# Altium PCB 4501-WB-AV-BMS-REV-C.PcbDoc
Units mm, origin at the board's own origin, x right, y up, seen from the top; angles counter-clockwise.
Board outline 182.69 x 84.61 mm, 4 copper layers (Top Layer, Int1 (GND), Int2 (PWR), Bottom Layer), stack 1.57 mm thick; 89 components, 79 nets, 324 pads, 146 vias.
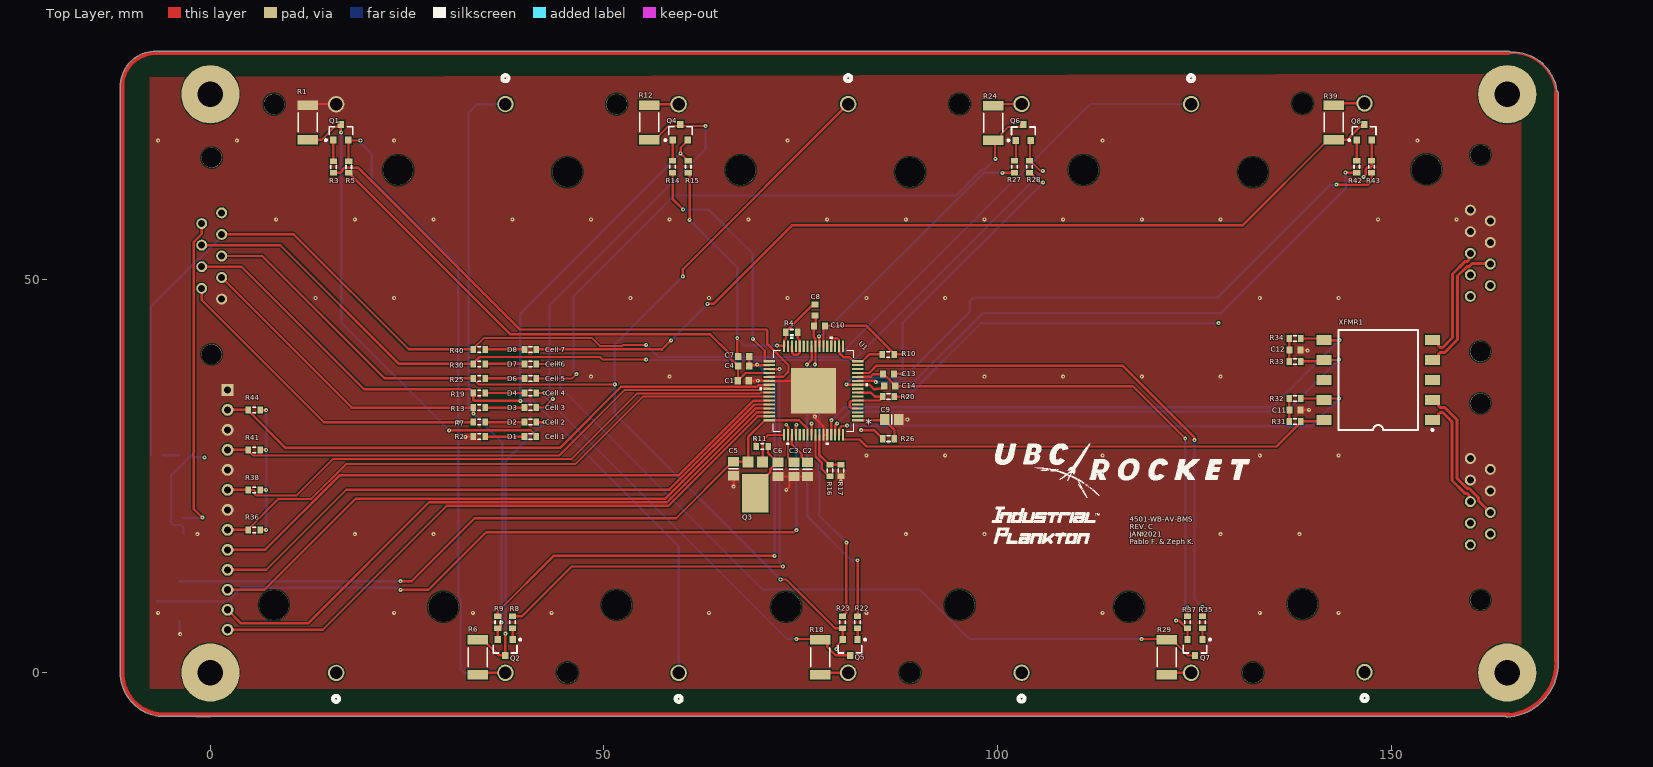
[diagram p0: Top Layer view]
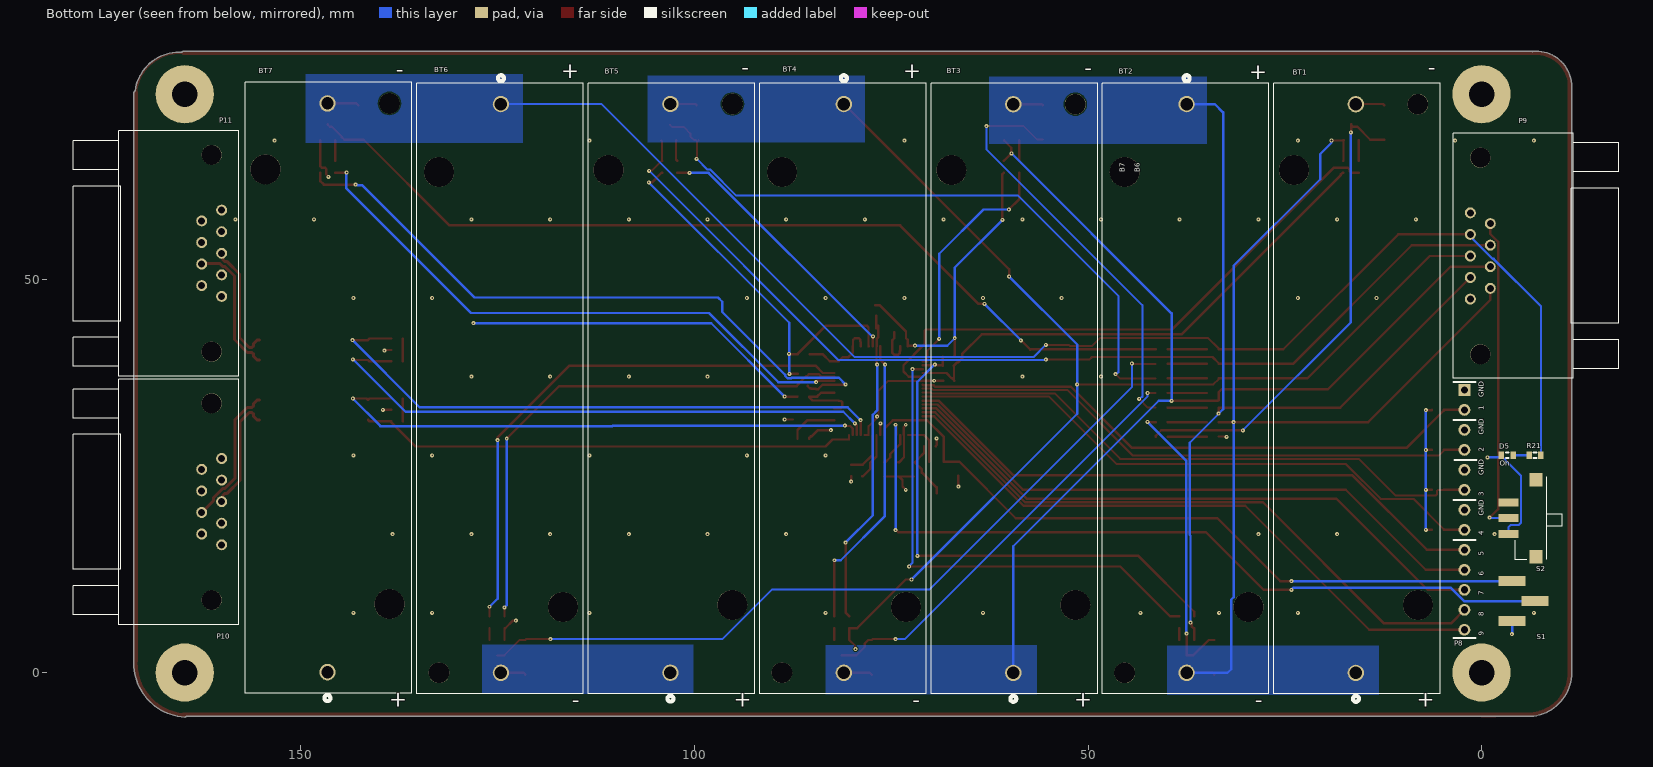
[diagram p1: Bottom Layer view, seen from below]
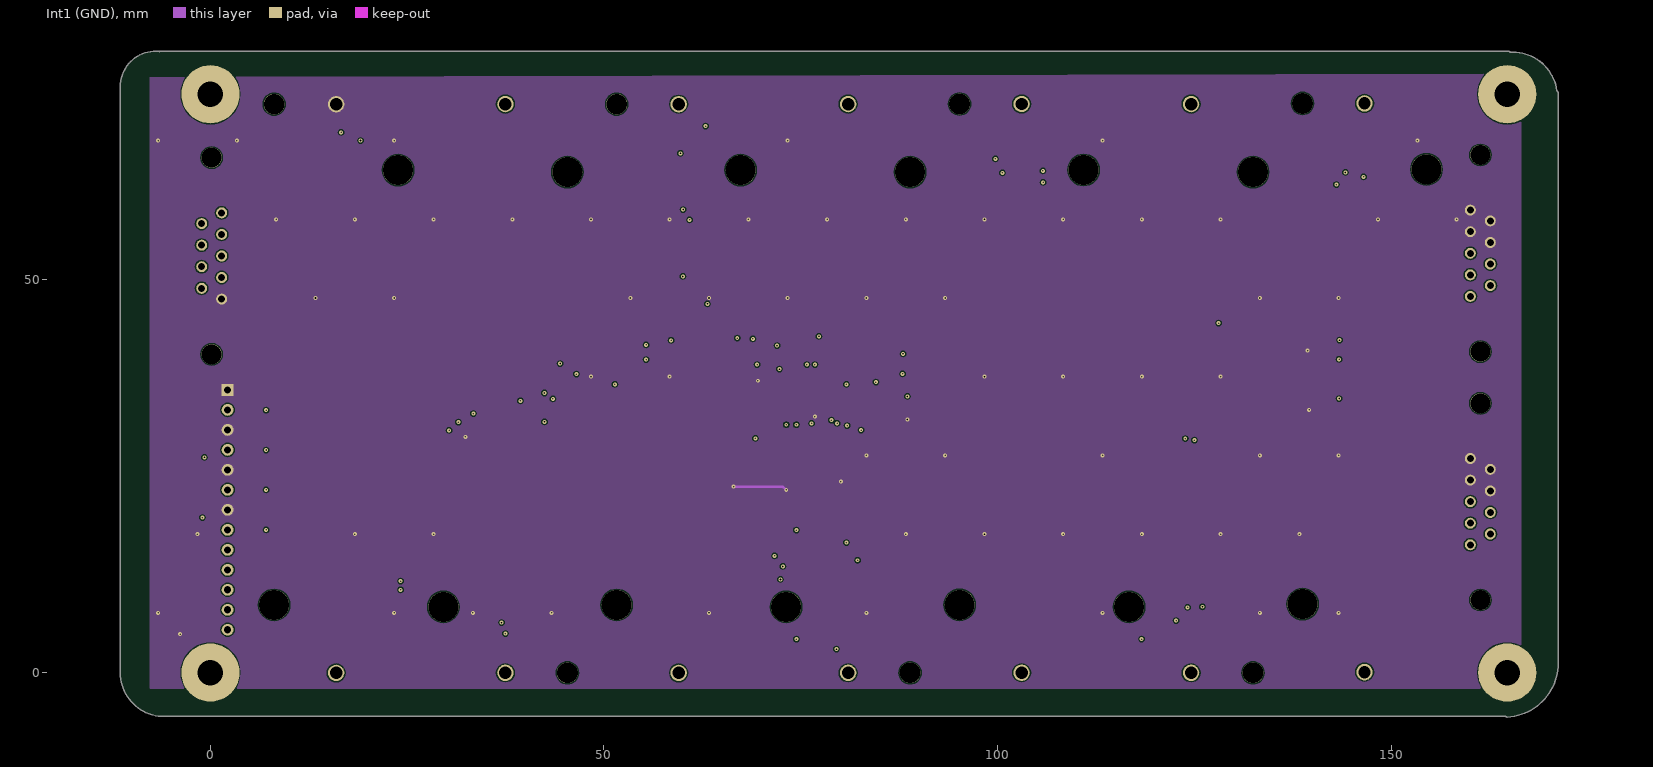
[diagram p2: Int1 (GND)]
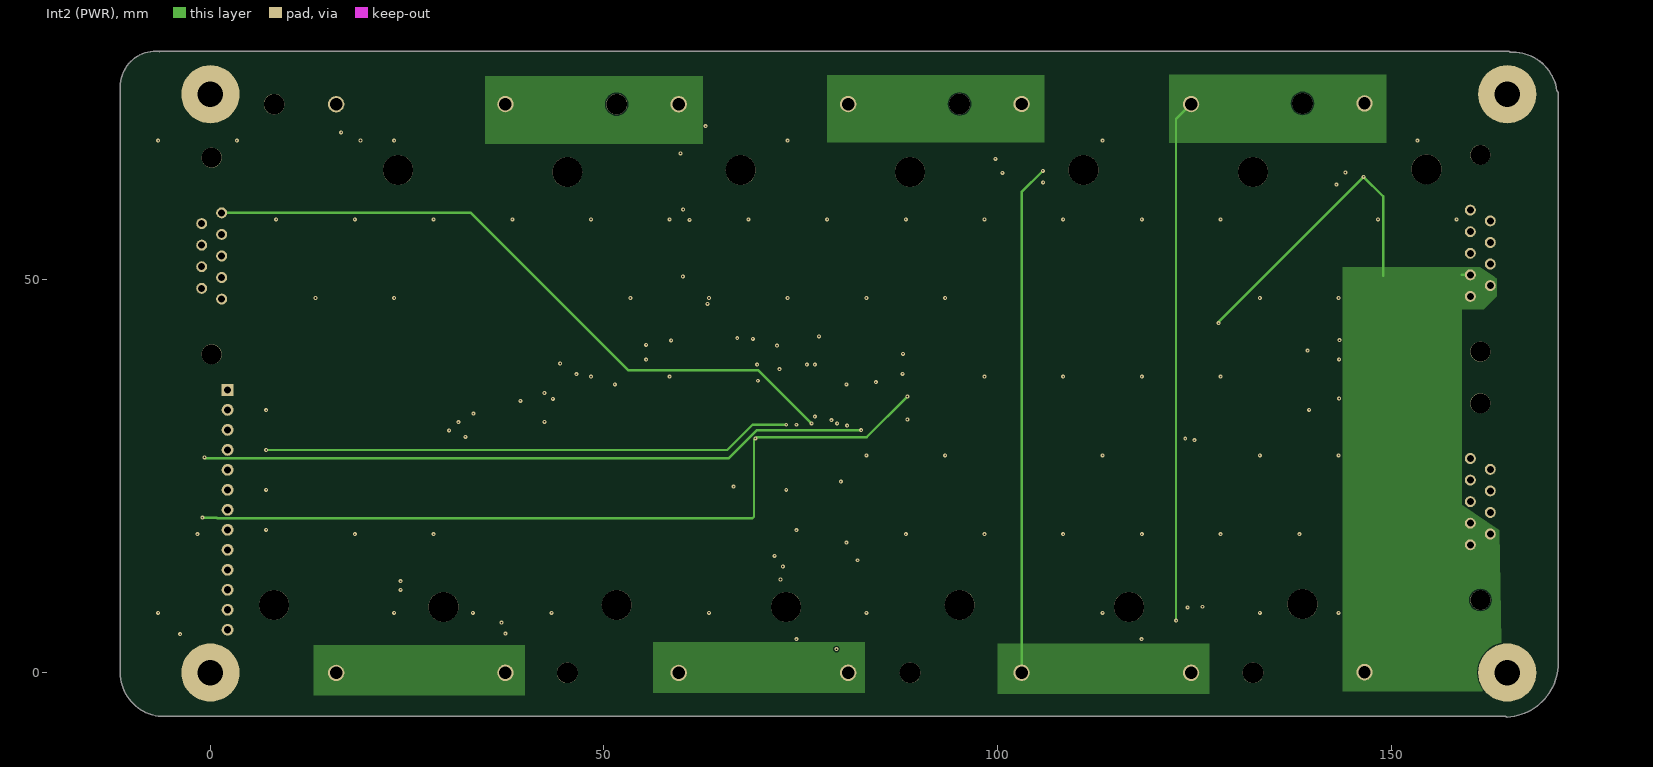
[diagram p3: Int2 (PWR)]
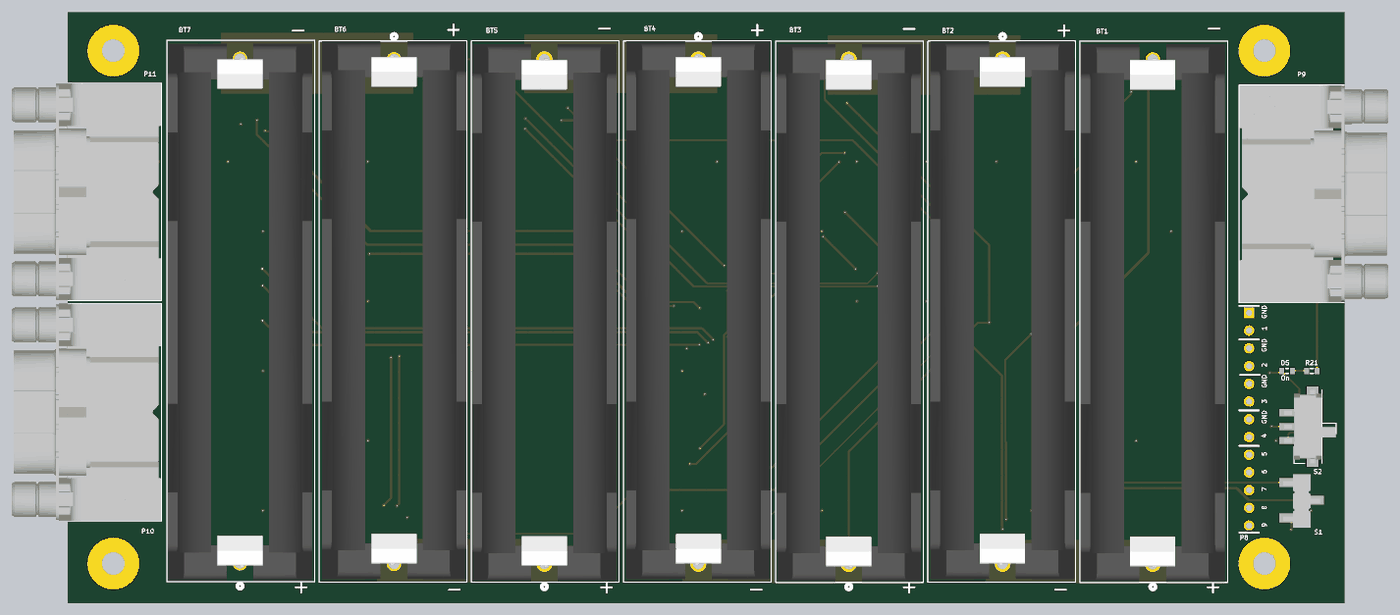
[diagram p4: 3D render of the assembled board from below, using the file's embedded part models]

## Layer stack, top to bottom
Top Solder: solder mask 0.0254, SM-001, Dk 4
Top Layer: signal copper 0.035
Dielectric 2: prepreg 0.2, PP-017, Dk 4.3
Int1 (GND): signal copper 0.0175
Dielectric 3: core 1.065, Core-039, Dk 4.8
Int2 (PWR): signal copper 0.0175
Dielectric 4: prepreg 0.2, PP-017, Dk 4.3
Bottom Layer: signal copper 0.035
Bottom Solder: solder mask 0.0254, SM-001, Dk 4

## Board outline
-11.447,-0.041 cw(c-11.196,-0.04) -11.447,-0.039 -11.447,74.799 cw(c-11.196,74.8) -11.446,74.822 cw(c-6.947,74.44) -6.565,78.939 cw(c-6.586,78.689) -6.461,78.906 cw(c-6.336,78.689) -6.336,78.94 164.922,78.94 cw(c164.922,78.689) 165.128,78.832 cw(c165.447,73.166) 171.072,73.919 cw(c170.97,73.69) 171.22,73.69 171.22,1.681 cw(c170.982,1.601) 171.232,1.617 cw(c164.37,1.202) 171.245,1.202 cw(c164.37,1.202) 164.785,-5.66 cw(c164.77,-5.41) 164.581,-5.574 -5.85,-5.574 -5.848,-5.574 ccw(c-5.85,-5.324) -5.847,-5.574 -5.848,-5.574 cw(c-5.881,-0.008)

## Design rules (kind name [scope] priority, off if disabled: settings)
AcuteAngle [All] p1: minimum=6.00000000000000E+0001 checktracksonly=FALSE
Clearance [All] p1: gap=0.152 ignorepadtopadclearanceinfootprint=FALSE except(0: Arc-Hole Track-Hole SMDPad-Hole THPad-Hole Via-Hole Fill-Hole Poly-Hole Region-Hole Text-Hole)
ComponentClearance [All] p1: gap=0 collisioncheckmode=3 verticalgap=0.003 showdistances=FALSE
DiffPairsRouting [All] p1: maxlimit=0.254 minlimit=0.254 mostfreqgap=0.254 toplayer_minwidth=0.381 toplayer_maxwidth=0.381 toplayer_prefwidth=0.381 midlayer1_minwidth=0.381 midlayer1_maxwidth=0.381 midlayer1_prefwidth=0.381 midlayer2_minwidth=0.381 midlayer2_maxwidth=0.381 midlayer2_prefwidth=0.381 bottomlayer_minwidth=0.381 bottomlayer_maxwidth=0.381 bottomlayer_prefwidth=0.381 maxuncoupledlength=12.7
HoleSize [All] p1: absolutevalues=TRUE maxlimit=25.4 minlimit=0.025 maxpercent=80.000 minpercent=20.000
MinimumSolderMaskSliver [All] p1: minsoldermaskwidth=0.025
PolygonConnect [All] p1: connectstyle=Direct reliefconductorwidth=0.254 reliefentries=4 polygonreliefangle="90 Angle" airgapwidth=0.254
RoutingVias [All] p1: holewidth=0.2 width=0.505 viastyle="Through Hole" minholewidth=0.2 minwidth=0.505 maxholewidth=0.711 maxwidth=1.27
SilkToSilkClearance [All] p1: silktosilkclearance=0.025
SilkToSolderMaskClearance [IsPad] p1: minsilkscreentomaskgap=0.025 clearancetoexposedcopper=TRUE
SolderMaskExpansion [All] p1: expansion=0.102 istentingtop=FALSE
Width [All] p1: maxlimit=2.794 minlimit=0.254 preferedwidth=0.305
24 further rules are at their usual default settings.

## Classes and differential pairs
differential pair IB: +IB_P -IB_N
differential pair IA: +IA_P -IA_N

## Components (designator, comment, footprint, x,y, rotation, side; value= is the part's Value field where it differs from the comment)
BT1 "Battery" 1043_KEY#1 15.969,72.22 r90 bottom
BT2 "Battery" 1043_KEY#1 37.477,-0.03 r270 bottom
BT3 "Battery" 1043_KEY#1 59.493,72.22 r90 bottom
BT4 "Battery" 1043_KEY#1 81.025,-0.03 r270 bottom
BT5 "Battery" 1043_KEY#1 103.065,72.243 r90 bottom
BT6 "Battery" 1043_KEY#2 124.597,-0.03 r270 bottom
BT7 "Battery" 1043_KEY#2 146.637,72.321 r90 bottom
C1 "399-1092-1-ND" 1608[0603] 67.714,37.079 r180 top value=10nF
C2 "311-3498-1-ND" 6-0805_N 75.877,25.813 r90 top value=1uF
C3 "311-3498-1-ND" 6-0805_N 74.116,25.813 r90 top value=1uF
C4 "399-1092-1-ND" 1608[0603] 67.749,38.956 r0 top value=10nF
C5 "311-3498-1-ND" 6-0805_N 66.472,25.9 r90 top value=1uF
C6 "1276-1090-1-ND" 6-0805_N 72.121,25.813 r90 top value=100nF
C7 "399-1092-1-ND" 1608[0603] 67.754,40.16 r180 top value=10nF
C8 "399-1092-1-ND" 1608[0603] 76.797,46.078 r270 top value=10nF
C9 "1276-1090-1-ND" 6-0805_N 86.564,32.179 r180 top value=100nF
C10 "399-1092-1-ND" 1608[0603] 77.377,44.049 r0 top value=10nF
C11 "399-1092-1-ND" 1608[0603] 137.805,33.371 r180 top value=10nF
C12 "399-1092-1-ND" 1608[0603] 137.805,40.991 r180 top value=10nF
C13 "399-1092-1-ND" 1608[0603] 86.164,37.948 r180 top value=10nF
C14 "399-1092-1-ND" 1608[0603] 86.309,36.398 r180 top value=10nF
D1 "160-1435-1-ND" J1-0603 40.654,29.972 r180 top
D2 "160-1435-1-ND" J1-0603 40.654,31.823 r180 top
D3 "160-1435-1-ND" J1-0603 40.654,33.673 r180 top
D4 "160-1435-1-ND" J1-0603 40.654,35.524 r180 top
D5 "LED0" J1-0603 -3.263,27.617 r180 bottom
D6 "160-1435-1-ND" J1-0603 40.654,37.375 r180 top
D7 "160-1435-1-ND" J1-0603 40.654,39.225 r180 top
D8 "160-1435-1-ND" J1-0603 40.654,41.076 r180 top
P8 "Header 13" DIP10 2.179,35.92 r180 bottom
P9 "3-338168-2" CONN_3-338168-2 22.09,58.416 r90 bottom
P10 "3-338168-2" CONN_3-338168-2 139.416,16.237 r270 bottom
P11 "3-338168-2" CONN_3-338168-2 139.416,47.797 r270 bottom
Q1 "BSS308PEH6327XTSA1CT-ND" SOT95P245X110-3N 16.571,68.649 r90 top
Q2 "BSS308PEH6327XTSA1CT-ND" SOT95P245X110-3N 37.453,3.188 r270 top
Q3 "DXT5551P5-13CT-ND" DXT5551P5-13 69.238,22.787 r180 top
Q4 "BSS308PEH6327XTSA1CT-ND" SOT95P245X110-3N 59.706,68.649 r90 top
Q5 "BSS308PEH6327XTSA1CT-ND" SOT95P245X110-3N 81.275,3.188 r270 top
Q6 "BSS308PEH6327XTSA1CT-ND" SOT95P245X110-3N 103.279,68.62 r90 top
Q7 "BSS308PEH6327XTSA1CT-ND" SOT95P245X110-3N 125.098,3.188 r270 top
Q8 "BSS308PEH6327XTSA1CT-ND" SOT95P245X110-3N 146.596,68.649 r90 top
R1 "A130642CT-ND" 12Z-2010 12.377,69.908 r90 top value=33
R2 "RMCF2010JT33R0CT-ND" J1-0603 34.166,29.972 r0 top value=475
R3 "A129543CT-ND" J1-0603 15.621,64.249 r270 top value=3.3k
R4 "A129676CT-ND" J1-0603 73.877,43.241 r0 top value=100
R5 "A129676CT-ND" J1-0603 17.571,64.249 r270 top value=100
R6 "A130642CT-ND" 12Z-2010 33.973,1.946 r270 top value=33
R7 "RMCF2010JT33R0CT-ND" J1-0603 34.166,31.823 r0 top value=475
R8 "A129543CT-ND" J1-0603 38.403,6.393 r90 top value=3.3k
R9 "A129676CT-ND" J1-0603 36.503,6.393 r90 top value=100
R10 "A129676CT-ND" J1-0603 86.111,40.437 r180 top value=100
R11 "A129676CT-ND" J1-0603 70.098,28.735 r180 top value=100
R12 "A130642CT-ND" 12Z-2010 55.74,69.908 r90 top value=33
R13 "RMCF2010JT33R0CT-ND" J1-0603 34.166,33.673 r0 top value=475
R14 "A129543CT-ND" J1-0603 58.717,64.262 r270 top value=3.3k
R15 "A129676CT-ND" J1-0603 60.706,64.262 r270 top value=100
R16 "RNCP0603FTD1K00CT-ND" J1-0603 78.715,25.677 r90 top value=1k
R17 "RNCP0603FTD1K00CT-ND" J1-0603 80.11,25.677 r270 top value=1k
R18 "A130642CT-ND" 12Z-2010 77.495,1.946 r270 top value=33
R19 "RMCF2010JT33R0CT-ND" J1-0603 34.166,35.524 r0 top value=475
R20 "A129676CT-ND" J1-0603 86.164,35.065 r180 top value=100
R21 "RMCF2010JT33R0CT-ND" J1-0603 -6.798,27.617 r180 bottom value=475
R22 "A129543CT-ND" J1-0603 82.225,6.393 r90 top value=3.3k
R23 "A129676CT-ND" J1-0603 80.325,6.393 r90 top value=100
R24 "A130642CT-ND" 12Z-2010 99.471,69.845 r90 top value=33
R25 "RMCF2010JT33R0CT-ND" J1-0603 34.166,37.375 r0 top value=475
R26 "A129676CT-ND" J1-0603 86.164,29.715 r180 top value=100
R27 "A129543CT-ND" J1-0603 102.184,64.262 r270 top value=3.3k
R28 "A129676CT-ND" J1-0603 104.084,64.262 r270 top value=100
R29 "A130642CT-ND" 12Z-2010 121.496,1.946 r270 top value=33
R30 "RMCF2010JT33R0CT-ND" J1-0603 34.166,39.225 r0 top value=475
R31 "311-2598-1-ND" J1-0603 137.805,31.921 r180 top value=50
R32 "311-2598-1-ND" J1-0603 137.805,34.826 r0 top value=50
R33 "311-2598-1-ND" J1-0603 137.805,39.536 r180 top value=50
R34 "311-2598-1-ND" J1-0603 137.805,42.446 r0 top value=50
R35 "A129543CT-ND" J1-0603 126.048,6.393 r90 top value=3.3k
R36 "RNCP0603FTD10K0CT-ND" J1-0603 5.55,18.14 r180 top value=10k
R37 "A129676CT-ND" J1-0603 124.148,6.393 r90 top value=100
R38 "RNCP0603FTD10K0CT-ND" J1-0603 5.55,23.22 r180 top value=10k
R39 "A130642CT-ND" 12Z-2010 142.733,69.908 r90 top value=33
R40 "RMCF2010JT33R0CT-ND" J1-0603 34.166,41.076 r0 top value=475
R41 "RNCP0603FTD10K0CT-ND" J1-0603 5.55,28.3 r180 top value=10k
R42 "A129543CT-ND" J1-0603 145.646,64.262 r270 top value=3.3k
R43 "A129676CT-ND" J1-0603 147.546,64.262 r270 top value=100
R44 "RNCP0603FTD10K0CT-ND" J1-0603 5.55,33.38 r180 top value=10k
S1 "S9337-ND, SAM8981-ND" *TSM-103-01-L-SV -5.338,9.083 r90 bottom
S2 "SS312SAH4-R" *SW_SS312SAH4-R -4.963,19.621 r0 bottom
U1 "LTC6812ILWE-1#3ZZPBF-ND" "LQFP64_LWE_A - duplicate" 76.627,35.815 r180 top value=Value
XFMR1 "1840-1032-1-ND" HM2100NLT 155.265,32.101 r180 top

## Footprints (in the part's own frame and the unit in brackets; to place one, negate y for a bottom-side part, rotate by r counter-clockwise, add the part's x,y. Pads: shape width x height; smd on the part's side, far side on the other; paste and mask are expansions set on the pad)
6-0805_N [mm] "Chip Resistor, Body 2.0x1.2mm, IPC Medium Density"
  rect 1.2x1.4 smd: 1(-0.9,0) 2(0.9,0)
  silkscreen extent 0,-0.6 0,0.6, body extent -1.07,-0.7 1.07,0.7, height 0.7
12Z-2010 [mm] "Chip Resistor, Body 5.0x2.5mm, IPC High Density"
  rect 1.2x2.6 smd: 1(-2.2,0) 2(2.2,0)
  silkscreen extent -1.2,-1.2 1.2,1.2, body extent -2.58,-1.33 2.58,1.33, height 0.9
1043_KEY#1 [mil]
  round 82 hole 62: 1(-2845,0) 2(0,0)
  round 150 hole 150 unplated: 3(-330,310) 5(-2505,-310)
  round 104 hole 104 unplated: 4(0,-310)
  silkscreen extent -2989,-422 105,412, body extent -2947,-406 87,407, height 585
1043_KEY#2 [mil]
  round 82 hole 62 mask+0: 1(-2845,0) 2(0,0)
  round 150 hole 150 unplated: 3(-330,310) 5(-2505,-310)
  round 104 hole 104 unplated: 4(0,-310)
  silkscreen extent -2989,-422 105,412, body extent -2947,-406 87,407, height 585
1608[0603] [mm] "Chip Capacitor, Body 1.6x0.8mm, IPC High Density"
  rect 0.8x0.9 smd: 1(-0.7,0) 2(0.7,0)
  body extent -0.87,-0.48 0.87,0.48, height 1.3
*SW_SS312SAH4-R [mm]
  rect 2.55x1 smd: 1(1.525,-2) 2(1.525,0) 3(1.525,2)
  rect 1.7x1.7 smd: P$1(-1.95,-4.9) P$2(-1.95,4.9)
  silkscreen extent -5.3,-5.25 0.7,5.3, body extent -5.27,-5.25 2.12,5.25, height 3.1
*TSM-103-01-L-SV [mm]
  rect 1.27x3.43 smd: 1(-2.54,1.46) 2(0,-1.46) 3(2.54,1.46)
  body extent -3.94,-2.64 3.68,2.64, height 9.78
CONN_3-338168-2 [mil]
  round 55 hole 35: 1(-431.5,-813.39) 2(-377.56,-913.39) 3(-323.62,-813.39) 4(-269.69,-913.39) 5(-215.75,-813.39) 6(-161.81,-913.39) 7(-107.87,-813.39) 8(-53.94,-913.39) 9(0,-813.39)
  round 100 hole 100: 10(-707.75,-863.69) 11(276.25,-863.69)
  silkscreen extent -828,-1556 399,-727, body extent -827,-1569 397,-730, height 67
DIP10 [mm]
  rect 1.5x1.5 hole 0.9: 1(0,0)
  round 1.5 hole 0.9: 2(0,-2.54) 3(0,-5.08) 4(0,-7.62) 5(0,-10.16) 6(0,-12.7) 7(0,-15.24) 8(0,-17.78) 9(0,-20.32) 10(0,-22.86) 11(0,-25.4) 12(0,-27.94) 13(0,-30.48)
  silkscreen extent -1.4,-31.5 1.52,1.02
DXT5551P5-13 [mm]
  rect 1.4x1.39 smd: 1(0.92,-3.982) 2(-0.92,-3.982)
  rect 3.36x4.86 smd: 3(0,0)
HM2100NLT [mm]
  rect 1.89x1.27 smd: 1(0,0) 2(0,-2.54) 3(0,-5.08) 4(0,-7.62) 5(0,-10.16) 6(13.79,0) 7(13.79,-2.54) 8(13.79,-5.08) 9(13.79,-7.62) 10(13.79,-10.16)
  silkscreen extent -0.13,-11.43 11.96,1.4, body extent -0.5,-12.3 14.47,2.4, height 3.3
J1-0603 [mm] "Chip Resistor, Body 1.6x0.8mm, IPC High Density"
  rect 0.7x0.9 smd: 1(-0.75,0) 2(0.75,0)
  silkscreen extent -0.2,-0.35 0.2,0.35, body extent -0.85,-0.48 0.85,0.48, height 0.9
"LQFP64_LWE_A - duplicate" [mm]
  rect 1.461x0.27 smd paste+0 mask+0: 1(-5.625,3.75) 2(-5.625,3.25) 3(-5.625,2.75) 4(-5.625,2.25) 5(-5.625,1.75) 6(-5.625,1.25) 7(-5.625,0.75) 8(-5.625,0.25) 9(-5.625,-0.25) 10(-5.625,-0.75) 11(-5.625,-1.25) 12(-5.625,-1.75) 13(-5.625,-2.25) 14(-5.625,-2.75) 15(-5.625,-3.25) 16(-5.625,-3.75) 33(5.625,-3.75) 34(5.625,-3.25) 35(5.625,-2.75) 36(5.625,-2.25) 37(5.625,-1.75) 38(5.625,-1.25) 39(5.625,-0.75) 40(5.625,-0.25) 41(5.625,0.25) 42(5.625,0.75) 43(5.625,1.25) 44(5.625,1.75) 45(5.625,2.25) 46(5.625,2.75) 47(5.625,3.25) 48(5.625,3.75)
  rect 0.27x1.461 smd paste+0 mask+0: 17(-3.75,-5.625) 18(-3.25,-5.625) 19(-2.75,-5.625) 20(-2.25,-5.625) 21(-1.75,-5.625) 22(-1.25,-5.625) 23(-0.75,-5.625) 24(-0.25,-5.625) 25(0.25,-5.625) 26(0.75,-5.625) 27(1.25,-5.625) 28(1.75,-5.625) 29(2.25,-5.625) 30(2.75,-5.625) 31(3.25,-5.625) 32(3.75,-5.625) 49(3.75,5.625) 50(3.25,5.625) 51(2.75,5.625) 52(2.25,5.625) 53(1.75,5.625) 54(1.25,5.625) 55(0.75,5.625) 56(0.25,5.625) 57(-0.25,5.625) 58(-0.75,5.625) 59(-1.25,5.625) 60(-1.75,5.625) 61(-2.25,5.625) 62(-2.75,5.625) 63(-3.25,5.625) 64(-3.75,5.625)
  rect 5.74x5.74 smd paste-2.857 mask+0: 65(0,0)
  silkscreen extent -6.86,-6.86 6.86,6.86, body extent 0,0 0.25,0.25, height 0.25
SOT95P245X110-3N [mm] "SOT23, 3-Leads, Body 2.90x2.45mm, Pitch 0.95mm, IPC Medium Density"
  rect 0.9x0.8 smd: 1(-1,0.95) 2(-1,-0.95) 3(1,0)
  silkscreen extent -1.12,-1.5 0.7,2.02, body extent -0.7,-1.5 0.7,1.5, height 1.1

## Part data
BT1 BT2 BT3 BT4 BT5 BT6 BT7: "Multicell Battery", LatestRevisionDate=17-Jul-2002, LatestRevisionNote="Re-released for DXP Platform.", PackageDescription="Battery; 2 Leads", PackageReference=BAT-2, Published=24-Mar-1999, Publisher="Altium Limited"
C1 C2 C3 C4 C5 C6 C7 C8 C9 C10 C11 C12 C13 C14: library part "Cap Semi", "Capacitor (Semiconductor SIM Model)", LatestRevisionDate=29-May-2009, LatestRevisionNote="IPC-7351 Footprint Added.", PackageDescription="Chip Capacitor", PackageReference=C1206, Published=8-Jun-2000, Publisher="Altium Limited"
  C1 C4 C7 C8 C10 C11 C12 C13 C14: SPN=399-1092-1-ND
  C2 C3 C5: SPN=311-3498-1-ND
  C6 C9: SPN=1276-1090-1-ND
D1 D2 D3 D4 D6 D7 D8: library part LED0, "Typical INFRARED GaAs LED", LatestRevisionDate=08-Jul-2005, LatestRevisionNote="Mech Layer 1 removed.", PackageDescription="LED; 2 Leads", PackageReference=LED-0, Published=8-Jun-2000, Publisher="Altium Limited", SPN=160-1435-1-ND
D5: "Typical INFRARED GaAs LED", LatestRevisionDate=08-Jul-2005, LatestRevisionNote="Mech Layer 1 removed.", PackageDescription="LED; 2 Leads", PackageReference=LED-0, Published=8-Jun-2000, Publisher="Altium Limited", SPN=160-1646-1-ND
P8: "Header, 13-Pin", LatestRevisionDate=17-Jul-2002, LatestRevisionNote="Re-released for DXP Platform.", Publisher="Altium Limited"
P9 P10 P11: library part "Header 9", "Header, 9-Pin", Supplier Part Number 1=A105035-ND, LatestRevisionDate=17-Jul-2002, LatestRevisionNote="Re-released for DXP Platform.", MPN=3-338168-2, Publisher="Altium Limited", SPN=A105035-ND, Supplier 1=Digi-Key
Q1 Q2 Q4 Q5 Q6 Q7 Q8: library part MOSFET-P, "P-Channel MOSFET", LatestRevisionDate=17-Jul-2002, LatestRevisionNote="Re-released for DXP Platform.", PackageDescription="TO, Flat Index; 3 In-Line, Axial Leads; Body Dia. 4.6mm; Lead Dia. 0.5 mm (max)", PackageReference=E3, PackageVersion=1995/1996, Published=8-Jun-2000, Publisher="Altium Limited", SPN=BSS308PEH6327XTSA1CT-ND
Q3: library part 2N3904, "NPN General Purpose Amplifier", ComponentLink1Description="Manufacturer Link", ComponentLink1URL=http://www.fairchildsemi.com/, ComponentLink2Description=Datasheet, ComponentLink2URL=http://www.fairchildsemi.com/ds/2N%2F2N3904.pdf, DatasheetVersion=1997, LatestRevisionDate=15-Jan-2003, LatestRevisionNote="PCB Footprint 'BCY-W3/D4.7' replaced", PackageDescription="TO, Flat Index; 3 In-Line, Axial Leads; Body Dia. 4.5mm; Leads 0.51 x 0.48 mm (max)", PackageReference=TO-92A, PackageVersion=Sep-1998, Published=8-Jun-2000, Publisher="Altium Limited", SPN=DXT5551P5-13CT-ND
R1 R2 R3 R4 R5 R6 R7 R8 R9 R10 R11 R12 R13 R14 R15 R16 R17 R18 R19 R20 R21 R22 R23 R24 R25 R26 R27 R28 R29 R30 R31 R32 R33 R34 R35 R36 R37 R38 R39 R40 R41 R42 R43 R44: library part Res3, "Resistor", LatestRevisionDate=29-May-2009, LatestRevisionNote="IPC-7351 Footprint Added.", PackageDescription="Chip Resistor", PackageReference=J1-0603, Published=8-Jun-2000, Publisher="Altium Limited"
  R1 R6 R12 R18 R24 R29 R39: SPN=A130642CT-ND
  R2 R7 R13 R19 R21 R25 R30 R40: SPN=RMCF2010JT33R0CT-ND
  R3 R8 R14 R22 R27 R35 R42: SPN=A129543CT-ND
  R4 R5 R9 R11 R15 R20 R23 R26 R28 R37 R43: Parameter 1=A129676CT-ND, SPN=A129676CT-ND
  R10: SPN=A129676CT-ND
  R16 R17: SPN=RNCP0603FTD1K00CT-ND
  R31 R32 R33 R34: SPN=311-2598-1-ND
  R36 R38 R41 R44: SPN=RNCP0603FTD10K0CT-ND
S1: library part SW-SPDT, "SPDT Subminiature Toggle Switch, Right Angle Mounting, Vertical Actuation", ComponentLink1Description="Manufacturer Link", ComponentLink1URL=http://www.apem.com, DatasheetVersion=05-Dec-2000, LatestRevisionDate=17-Dec-2003, LatestRevisionNote="Schematic revised, PCB Footprint replaced.", PackageDescription="Switch; 4 Leads", PackageReference=TL36WW15050, Published=24-Mar-1999, Publisher="Altium Limited", SPN="S9337-ND, SAM8981-ND"
S2: "Switch Slide ON None ON SPDT Side Slide 0.1A 28VAC 28VDC 0.4VA 10000Cycles Gull Wing SMD T/R", Package=None, Availability=Unavailable, MF="NKK Switches", MP=SS312SAH4-R, Price=None, SnapEDA_Link=https://www.snapeda.com/parts/SS312SAH4-R/NKK%20Switches/view-part/?ref=snap, SPN=‎360-2924-1-ND‎
U1: library part LTC6812HLWE-1, "No Description Available", Copyright="Copyright (C) 2018 Accelerated Designs. All rights reserved", RefDes=RefDes, SPN=LTC6812ILWE-1#3ZZPBF-ND, Type=DEV
XFMR1: library part "Header 5X2A", "Header, 5-Pin, Dual row / HM2100NLT", LatestRevisionDate=17-Jul-2002, LatestRevisionNote="Re-released for DXP Platform.", Publisher="Altium Limited", SPN=1840-1032-1-ND

## Free pads (board coordinates)
  round 7.4 hole 3.251: 1(0,0) 1(0,73.492) 1(164.77,0) 1(164.77,73.492)

## Via types
v1: diameter 0.505, hole 0.2, Top Layer to Bottom Layer, tented both sides, 146 vias

## Nets (pads, with @x,y where several pads share a name; then routed paths per layer and width w, separated by ;. In a path a pad name is that pad's centre, name@x,y a point inside that pad or via, vN(x,y) a via of type N, cw(c..) or ccw(c..) an arc to the next point about the centre after c; other vN are vias at no path point)
C1: C1.2 C4.1 R5.2 U1.36 | length 66.3
  Top Layer w0.305: R5.2 17.671,63.499 17.869,63.302 17.869,63.236 38.13,42.974 63.501,42.974 65.997,40.478 65.997,39.937 66.528,39.405 66.65,39.405 67.049,39.006 C4.1 67.032,38.938 C1.2@67.032,37.097 ; C1.2 C1.2@67.032,37.097 ; U1.36 68,38.065 67.311,37.377 67.261,37.377 67.032,37.147 C1.2@67.032,37.097
C2: C4.2 C7.1 R9.2 U1.34 | length 67.6
  Top Layer w0.305: R9.2 36.503,7.731 43.602,14.831 v1(71.697,14.831) ; C4.2 C4.2@68.452,38.959 ; C7.1 68.452,40.157 C4.2@68.452,38.959 ; U1.34 70.985,39.048 68.541,39.048 C4.2@68.452,38.959
  Bottom Layer w0.305: v1@69.616,39.024 71.697,36.943 v1(71.697,14.831)
  other v1: 69.461,39.124
C3: C7.2 C8.1 R4.1 R15.2 U1.32 | length 39.7
  Top Layer w0.305: R15.2 60.884,63.334 v1(60.884,57.526) ; v1(66.936,42.487) 66.936,40.279 C7.2 ; v1(71.989,41.534) 72.86,41.534 U1.32@72.895,41.499 ; U1.32 72.895,41.458 U1.32@72.895,41.499 ; C8.1@77.057,46.654 76.44,46.654 73.127,43.341 R4.1 73.127,42.487 72.895,42.254 U1.32@72.895,41.499
  Bottom Layer w0.305: v1(60.884,57.526) 66.936,51.474 v1(66.936,42.487) 67.889,41.534 v1(71.989,41.534)
C6: C8.2 C10.1 R23.2 U1.24 | length 40.5
  Top Layer w0.305: C10.1 76.677,42.577 76.86,42.394 76.86,41.458 U1.24 76.877,39.258 76.797,39.178 v1(76.797,39.124) ; C10.1@76.92,43.734 C8.2@76.92,45.354 ; R23.2 80.802,7.621 v1(80.802,16.515)
  Bottom Layer w0.305: v1(76.797,39.124) 76.797,33.308 77.354,32.75 77.354,19.963 v1(80.802,16.515)
C7: C10.2 C13.1 R10.1 R28.2 U1.22 | length 49.2
  Top Layer w0.305: U1.22 77.895,41.458 77.895,43.866 C10.2 83.349,44.049 86.861,40.537 R10.1 v1@87.94,40.437 ; C13.1 v1(87.94,37.948) ; R28.2 104.184,63.512 105.418,62.278 v1(105.806,62.278)
  Bottom Layer w0.305: v1(87.94,37.948) 87.94,40.437 v1(87.996,40.493) 87.974,40.493 87.974,44.446 v1(105.806,62.278)
C11: C13.2 C14.1 R37.2 U1.12 | length 67.7
  Top Layer w0.305: U1.12 83.857,37.565 84.19,37.898 85.464,37.898 85.712,37.65 85.83,37.65 86.864,36.615 C14.1@86.864,36.565 ; C14.1 117.188,36.398 v1(123.858,29.728) ; R37.2 124.148,8.274 v1(124.154,8.28)
  Bottom Layer w0.305: v1(123.858,29.728) 123.858,8.576 v1(124.154,8.28)
C12: C14.2 R43.2 U1.10 | length 84.6
  Top Layer w0.305: v1(80.802,36.615) 80.852,36.565 U1.10 83.736,36.565 84.288,36.013 84.54,36.013 84.592,36.065 85.178,36.065 85.239,36.126 85.357,36.126 85.604,36.374 C14.2@85.604,36.424 ; v1(143.048,61.996) 147.094,61.996 147.546,62.448 R43.2
  Bottom Layer w0.305: v1(80.802,36.615) 81.655,37.468 87.632,37.468 87.709,37.39 88.171,37.39 88.497,37.717 88.497,37.838 96.482,45.823 96.482,47.114 97.025,47.658 127.947,47.658 142.197,61.907 142.811,61.907 142.9,61.996 v1(143.048,61.996)
Cell1: BT1.1 BT2.2 P9.2 Q1.2 R5.1 R6.2 R7.1 | length 130.7
  Top Layer w0.305: P9.2 -1.11,47.338 14.405,31.823 R7.1 33.404,31.811 v1(31.499,31.811) ; R5.1 17.546,65.024 17.546,67.624 Q1.2 17.567,67.602 v1(19.07,67.602) ; R6.2 34.196,-0.03 BT2.2@37.453,-0.03
  Int2 (PWR) w0.305: BT1.1@15.969,-0.02 BT1.1@16.154,-0.206
  Bottom Layer w0.305: v1(19.07,67.602) 19.07,67.323 20.505,65.888 20.505,62.692 31.499,51.699 v1(31.499,31.811) 31.499,9.581 31.813,9.267 31.813,0.433 32.276,-0.03 BT2.2
Cell2: BT2.1 BT3.2 P9.3 Q2.2 R9.1 R12.2 R13.1 | length 117.5
  Top Layer w0.305: P9.3 17.953,33.673 R13.1 33.416,32.915 v1(33.396,32.896) ; Q2.2 R9.1 36.603,5.643 36.8,5.841 36.8,6.102 36.984,6.286 v1(36.984,6.34) ; R12.2 55.852,72.22 BT3.2
  Bottom Layer w0.305: v1(36.984,6.34) 36.984,17.385 37.084,17.485 37.084,29.207 v1(33.396,32.896) 32.831,33.46 32.831,71.173 33.891,72.233 BT2.1
Cell3: BT3.1 BT4.2 P9.4 Q4.2 R15.1 R18.2 R19.1 | length 138.9
  Top Layer w0.305: P9.4 3.943,51.566 19.512,35.997 33.042,35.997 33.416,35.624 33.416,34.612 33.491,34.536 v1(39.378,34.536) ; Q4.2 60.656,67.599 59.749,66.691 59.749,66.007 v1(59.723,65.982) 59.736,65.982 R15.1 ; R18.2 77.719,-0.03 BT4.2
  Bottom Layer w0.305: BT3.1@59.493,-0.02 59.493,16.062 41.018,34.536 v1(39.378,34.536) 39.378,45.636 v1(59.723,65.982)
Cell4: BT4.1 BT5.2 P9.5 Q5.2 R23.1 R24.2 R25.1 | length 155
  Top Layer w0.254: R25.1 33.416,37.275 34.079,36.612 v1(51.377,36.612) ; v1(79.545,2.982) 79.593,3.03 79.593,3.406 80.325,4.138 Q5.2
  Top Layer w0.305: P9.5 6.576,52.936 22.138,37.375 R25.1 ; v1(60.033,50.33) 60.033,51.241 BT4.1 ; v1(72.428,11.829) 73.162,11.829 79.348,5.643 R23.1 Q5.2 ; R24.2@99.746,72.108 99.88,72.243 BT5.2
  Bottom Layer w0.305: v1(60.033,50.33) 51.377,41.674 v1(51.377,36.612) 51.377,32.88 v1(72.428,11.829)
Cell5: BT5.1 BT6.2 P9.6 Q6.2 R28.1 R29.2 R30.1 | length 196.6
  Top Layer w0.254: R30.1 33.416,39.325 34.189,40.099 49.494,40.099 49.835,39.759 v1(55.354,39.759) ; Q6.2 104.145,67.536 104.145,65.073 R28.1 104.184,65.012 105.394,63.802 105.715,63.802 v1(105.763,63.754)
  Top Layer w0.305: P9.6 8.874,54.306 23.955,39.225 R30.1 ; R29.2 121.72,-0.03 BT6.2
  Int2 (PWR) w0.305: BT5.1 103.065,61.056 v1(105.763,63.754)
  Bottom Layer w0.254: v1(55.354,39.759) 55.397,39.715 81.724,39.715 v1(105.763,63.754)
Cell6: BT6.1 BT7.2 P9.7 Q7.2 R21.2 R37.1 R39.2 R40.1 | length 249.8
  Top Layer w0.254: R40.1 33.416,41.176 34.782,42.542 48.443,42.542 49.477,41.508 52.319,41.508 52.445,41.633 v1(55.354,41.633)
  Top Layer w0.305: P9.7 10.587,55.676 25.188,41.076 R40.1 ; v1(122.687,6.607) 123.084,6.607 124.048,5.643 R37.1 Q7.2 ; R39.2 142.946,72.321 BT7.2
  Int2 (PWR) w0.305: v1(122.687,6.607) 122.687,70.323 BT6.1
  Bottom Layer w0.254: v1(55.354,41.633) 56.865,40.122 79.7,40.122 111.811,72.233 BT6.1
  Bottom Layer w0.305: R21.2 -7.548,46.547 -1.525,52.569 -1.428,52.569 1.43,55.427 P9.7
CS: R34.2 U1.61 XFMR1.10 | length 75.7
  Top Layer w0.305: U1.61 78.877,32.048 v1(78.895,32.065) ; R34.2 141.29,42.446 XFMR1.10 141.49,42.245 v1(143.459,42.245)
  Bottom Layer w0.305: v1(78.895,32.065) 80.533,33.703 134.917,33.703 v1(143.459,42.245)
DRIVE: Q3.2 U1.49 | length 5.7
  Top Layer w0.305: Q3.2 70.158,29.485 70.863,30.19 U1.49
GND: BT1.2 C1.1 C2.1 C3.1 C5.1 C6.1 C9.1 C11.1 C12.1 P8.1 P8.3 P8.5 P8.7 P9.1 P10.1 P10.2 P10.3 P10.4 P11.1 P11.2 P11.3 P11.4 R1.2 R2.1 R17.2 S1.1 U1.38 U1.59 U1.60 U1.65 | length 39.8
  Top Layer w0.254: v1(32.398,29.939) 32.365,29.972 R2.1 ; U1.38 75.377,37.065 U1.65 v1@76.627,32.565 ; v1(76.797,32.52) 76.673,32.52 v1@76.627,32.565 ; U1.60 U1.59 77.869,30.198 77.869,31.323 v1@76.627,32.565 ; C9.1 88.537,32.179 v1(88.555,32.161)
  Top Layer w0.305: R1.2 12.512,72.243 BT1.2@15.969,72.243 ; v1(66.472,23.632) C5.1 ; C1.1 68.423,37.088 69.537,37.088 v1(69.544,37.081) 70.987,37.081 U1.38 ; C6.1 C3.1@74.016,24.913 ; v1(73.162,23.226) 73.569,23.632 73.569,24.466 C3.1@74.016,24.913 ; C2.1 C3.1 C3.1@74.016,24.913 ; v1(80.096,24.264) 80.11,24.277 R17.2 ; C11.1 139.606,33.371 v1(139.611,33.376) ; C12.1 139.319,40.991 v1(139.398,40.912)
  Int1 (GND) w0.305: v1(66.472,23.632) 72.701,23.632 73.108,23.226 v1(73.162,23.226)
  Bottom Layer w0.305: S1.1 -3.878,4.917 v1(-3.843,4.882)
  other v1: -6.651,7.597 23.349,7.597 33.349,7.597 43.349,7.597 63.349,7.597 83.349,7.597 113.349,7.597 133.349,7.597 143.349,7.597 -1.651,17.597 18.349,17.597 28.349,17.597 88.349,17.597 98.349,17.597 108.349,17.597 118.349,17.597 128.349,17.597 138.349,17.597 83.349,27.597 93.349,27.597 113.349,27.597 133.349,27.597 143.349,27.597 48.349,37.597 58.349,37.597 98.349,37.597 108.349,37.597 118.349,37.597 128.349,37.597 13.349,47.597 23.349,47.597 53.349,47.597 63.349,47.597 73.349,47.597 83.349,47.597 93.349,47.597 133.349,47.597 143.349,47.597 8.349,57.597 18.349,57.597 28.349,57.597 38.349,57.597 48.349,57.597 58.349,57.597 68.349,57.597 78.349,57.597 88.349,57.597 98.349,57.597 108.349,57.597 118.349,57.597 128.349,57.597 148.349,57.597 158.349,57.597 -6.651,67.597 3.349,67.597 23.349,67.597 73.349,67.597 113.349,67.597 153.349,67.597
GPIO1: P8.2 R44.2 U1.39 | length 74.3
  Top Layer w0.305: P8.2 2.286,33.487 2.394,33.38 R44.2 4.8,33.28 9.525,28.555 44.409,28.555 52.165,36.31 69.441,36.31 69.655,36.524 70.961,36.524 U1.39
GPIO2: P8.4 R41.2 U1.40 | length 72.7
  Top Layer w0.254: R41.2 4.8,28.2 5.429,27.571 44.284,27.571 52.591,35.878 69.66,35.878 69.847,36.065 U1.40
  Top Layer w0.305: P8.4 R41.2
GPIO3: P8.6 R38.2 U1.41 | length 74.8
  Top Layer w0.254: R38.2 5.522,23.22 5.67,23.071 5.67,22.654 5.834,22.491 10.902,22.491 15.576,27.164 45.93,27.164 54.237,35.472 69.828,35.472 69.922,35.565 U1.41
  Top Layer w0.305: P8.6 R38.2
GPIO4: P8.8 R36.2 U1.42 | length 75.9
  Top Layer w0.254: R36.2 4.8,18.24 8.644,22.084 12.822,22.084 17.225,26.487 46.375,26.487 54.953,35.065 U1.42
  Top Layer w0.305: P8.8 R36.2
GPIO5: P8.9 U1.43 | length 76.7
  Top Layer w0.305: P8.9 6.949,15.6 16.412,25.063 59.473,25.063 68.933,34.522 70.285,34.522 70.31,34.548 70.985,34.548 U1.43
GPIO6: P8.10 U1.44 | length 77.5
  Top Layer w0.305: P8.10 7.086,13.06 17.252,23.226 58.282,23.226 69.122,34.065 U1.44
GPIO7: P8.11 U1.45 | length 78.4
  Top Layer w0.305: P8.11 6.874,10.52 18.457,22.103 57.806,22.103 69.268,33.565 U1.45
GPIO8: P8.12 U1.46 | length 80.6
  Top Layer w0.305: P8.12 3.9,6.259 12.395,6.259 27.783,21.646 57.996,21.646 69.415,33.065 U1.46
GPIO9: P8.13 U1.47 | length 80.1
  Top Layer w0.305: P8.13 14.271,5.44 30.02,21.189 58.185,21.189 66.3,29.304 66.936,29.939 69.544,32.548 70.985,32.548 U1.47
IA_N: P11.6 XFMR1.4 | length 17.4
  Top Layer w0.381: XFMR1.4 155.575,39.721 156.02,40.165 156.02,40.45 156.243,40.673 156.821,40.673 158.457,42.309 158.457,50.391 159.645,51.578 159.922,51.578 160.351,52.007 162.516,52.007 P11.6
IA_P: P11.5 XFMR1.5 | length 15.4
  Top Layer w0.381: XFMR1.5 155.575,42.261 156.02,41.816 156.02,41.531 156.243,41.308 156.558,41.308 157.822,42.572 157.822,50.654 159.381,52.213 159.659,52.213 159.882,52.436 159.882,53.083 P11.5
IB_N: P10.6 XFMR1.2 | length 18
  Top Layer w0.381: XFMR1.2 155.575,34.641 156.02,34.196 156.02,33.911 156.243,33.688 156.821,33.688 158.38,32.129 158.38,24.68 159.645,23.416 159.922,23.416 161.123,22.215 161.123,21.84 P10.6
IB_P: P10.5 XFMR1.1 | length 14.8
  Top Layer w0.381: XFMR1.1 155.575,32.101 156.02,32.545 156.02,32.83 156.243,33.053 156.558,33.053 157.745,31.866 157.745,24.417 159.381,22.781 159.659,22.781 159.882,22.558 159.882,21.911 P10.5
NetC6_2: C6.2 Q3.3 R11.1 | length 7.6
  Top Layer w0.305: Q3.3 69.238,23.537 71.116,25.415 71.116,25.809 72.021,26.713 71.573,27.161 71.573,27.179 70.848,27.904 R11.1
NetC9_2: C9.2 R26.1 U1.1 | length 6.3
  Top Layer w0.305: U1.1 85.65,32.065 85.664,32.079 86.914,30.829 R26.1
NetC11_2: C11.2 R31.2 R32.1 | length 2.9
  Top Layer w0.305: R31.2 R32.1
NetC12_2: C12.2 R33.2 R34.1 | length 2.9
  Top Layer w0.305: R33.2 R34.1
NetD1_1: D1.1 Q1.3 R1.1 | length 61
  Top Layer w0.305: R1.1 14.135,67.708 15.777,69.351 16.323,69.351 Q1.3@16.571,69.599 ; Q1.3 Q1.3@16.571,69.599 ; v1(16.601,68.641) 16.571,68.671 Q1.3@16.571,69.599 ; v1(30.335,30.785) 40.691,30.785 41.404,30.072 D1.1
  Bottom Layer w0.305: v1(16.601,68.641) 16.601,44.519 v1(30.335,30.785)
NetD1_2: D1.2 R2.2 | length 5
  Top Layer w0.305: R2.2 D1.2
NetD2_1: D2.1 Q2.3 R6.1 | length 37.1
  Top Layer w0.305: R6.1 34.673,4.146 36.596,2.223 37.418,2.223 Q2.3 37.453,4.922 v1(37.477,4.946) ; D2.1 42.421,31.823 v1(42.445,31.846)
  Bottom Layer w0.305: v1(37.477,4.946) 37.541,5.011 37.541,26.943 v1(42.445,31.846)
NetD2_2: D2.2 R7.2 | length 5
  Top Layer w0.305: R7.2 D2.2
NetD3_1: D3.1 Q4.3 R12.1 | length 53.6
  Top Layer w0.254: D3.1 42.421,33.673 v1(43.519,34.771) ; R12.1 56.44,67.708 58.173,69.441 v1(62.923,69.441)
  Bottom Layer w0.254: v1(43.519,34.771) 43.451,34.771 43.202,35.021 43.092,35.021 43.092,46.674 62.923,66.505 v1(62.923,69.441)
NetD3_2: D3.2 R13.2 | length 5
  Top Layer w0.305: R13.2 D3.2
NetD4_1: D4.1 Q5.3 R18.1 | length 54.2
  Top Layer w0.254: D4.1 v1(42.421,35.524) ; v1(74.442,4.239) 77.402,4.239 R18.1
  Top Layer w0.305: R18.1 77.926,4.146 78.374,3.698 78.374,3.267 79.453,2.188 Q5.3
  Bottom Layer w0.254: v1(42.421,35.524) 42.469,35.476 42.469,35.069 73.299,4.239 v1(74.442,4.239)
NetD4_2: D4.2 R19.2 | length 5
  Top Layer w0.305: R19.2 D4.2
NetD5_1: D5.1 R26.2 S2.3 | length 102.4
  Top Layer w0.305: v1(82.682,30.813) 84.317,30.813 85.117,30.013 85.217,30.013 85.414,29.815 R26.2
  Int2 (PWR) w0.305: v1(-0.759,27.341) -0.664,27.245 65.884,27.245 69.451,30.813 v1(82.682,30.813)
  Bottom Layer w0.254: S2.3 -3.438,18.503 -3.69,18.754 -4.741,18.754 -4.993,19.006 -4.993,25.038 -2.513,27.517 D5.1
  Bottom Layer w0.305: D5.1 -2.513,27.538 -2.316,27.341 v1(-0.759,27.341)
NetD5_2: D5.2 R21.1 | length 2
  Bottom Layer w0.305: R21.1 D5.2
NetD6_1: D6.1 Q6.3 R24.1 | length 83.2
  Top Layer w0.254: D6.1 45.946,37.375 v1(46.499,37.928) ; R24.1 99.703,67.414 99.703,65.305 v1(99.727,65.28) ; R24.1@99.802,67.653 100.049,67.653 100.515,68.118 100.515,68.477 101.363,69.326 102.861,69.326 103.134,69.599 Q6.3@103.134,69.649
  Bottom Layer w0.254: v1(46.499,37.928) 46.431,37.928 46.246,38.113 46.137,38.113 46.137,47.856 58.918,60.637 94.739,60.637 98.024,63.922 98.369,63.922 v1(99.727,65.28)
NetD6_2: D6.2 R25.2 | length 5
  Top Layer w0.305: R25.2 D6.2
NetD7_1: D7.1 Q7.3 R29.1 | length 100.8
  Top Layer w0.254: D7.1 44.389,39.225 v1(44.432,39.268) ; v1(118.308,4.255) 121.387,4.255 R29.1 122.196,4.146 124.154,2.188 Q7.3
  Bottom Layer w0.254: v1(44.432,39.268) 44.432,36.271 70.168,10.536 90.181,10.536 96.463,4.255 v1(118.308,4.255)
NetD7_2: D7.2 R30.2 | length 5
  Top Layer w0.305: R30.2 D7.2
NetD8_1: D8.1 Q8.3 R39.1 | length 117.1
  Top Layer w0.305: D8.1 57.314,41.076 57.346,41.044 v1(58.525,42.224) ; v1(63.155,46.853) 63.915,46.853 73.885,56.823 131.148,56.823 142.033,67.708 R39.1 144.49,67.708 144.805,68.023 144.805,68.088 146.067,69.351 146.348,69.351 146.596,69.599 Q8.3
  Bottom Layer w0.305: v1(58.525,42.224) v1(63.155,46.853)
NetD8_2: D8.2 R40.2 | length 5
  Top Layer w0.305: R40.2 D8.2
NetQ1_2: Q1.1 R3.1 | length 2.6
  Top Layer w0.305: R3.1 Q1.1
NetQ2_2: Q2.1 R8.1 | length 1.5
  Top Layer w0.305: Q2.1 R8.1
NetQ4_2: Q4.1 R14.1 | length 2.7
  Top Layer w0.305: R14.1 58.737,65.031 58.737,67.629 Q4.1
NetQ5_2: Q5.1 R22.1 | length 1.5
  Top Layer w0.305: Q5.1 R22.1
NetQ6_2: Q6.1 R27.1 | length 2.7
  Top Layer w0.305: R27.1 102.357,65.184 102.357,67.592 Q6.1
NetQ7_2: Q7.1 R35.1 | length 1.5
  Top Layer w0.305: Q7.1 R35.1
NetQ8_2: Q8.1 R42.1 | length 2.6
  Top Layer w0.305: R42.1 Q8.1
NetR4_2: R4.2 U1.28 U1.30 | length 4.7
  Top Layer w0.305: U1.30 73.877,40.879 73.938,40.819 73.938,40.583 74.116,40.405 74.639,40.405 74.86,40.626 74.86,41.423 U1.28 74.86,41.458 74.86,42.254 74.627,42.487 R4.2
NetR10_2: R10.2 U1.16 U1.18 U1.20 | length 9.9
  Top Layer w0.305: U1.20 78.877,42.001 78.938,42.061 78.938,42.297 79.116,42.476 79.639,42.476 79.86,42.254 79.86,41.458 U1.18 79.895,41.423 79.895,40.626 80.438,40.083 81.174,40.083 81.692,39.565 U1.16 82.813,39.565 83.685,40.437 R10.2
NetR16_1: R16.1 U1.57 | length 6.1
  Top Layer w0.305: U1.57 76.877,27.444 77.647,26.674 77.647,25.895 78.615,24.927 R16.1
NetR16_2: R16.2 R17.1 U1.58 | length 5.8
  Top Layer w0.305: U1.58 77.377,27.665 78.615,26.427 R16.2 R17.1
NetR20_2: R20.2 U1.4 U1.6 U1.8 | length 9.6
  Top Layer w0.305: U1.4 82.235,33.583 81.438,33.583 81.217,33.804 81.217,34.326 81.396,34.505 81.631,34.505 81.692,34.565 U1.6 85.014,34.565 85.414,34.965 R20.2 84.423,35.065 83.922,35.565 U1.8
NetR31_1: R31.1 U1.64 XFMR1.6 | length 63.5
  Top Layer w0.305: U1.64 80.377,29.629 80.395,29.612 82.487,29.612 83.372,28.727 135.462,28.727 138.555,31.821 R31.1@138.555,31.916 ; R31.1 R31.1@138.555,31.916 ; XFMR1.6 141.29,31.916 R31.1@138.555,31.916
NetR32_2: R32.2 U1.63 XFMR1.7 | length 71
  Top Layer w0.305: U1.63 79.895,30.208 79.895,31.004 80.222,31.332 80.868,31.332 v1(80.907,31.37) ; R32.2 141.29,34.826 XFMR1.7 141.658,34.823 v1(143.416,34.823)
  Bottom Layer w0.305: v1(80.907,31.37) 110.415,31.37 110.462,31.323 139.916,31.323 v1(143.416,34.823)
NetS1_2: S1.2 U1.52 | length 99.9
  Top Layer w0.305: v1(24.166,10.52) 27.706,10.52 35.043,17.856 74.116,17.856 74.362,18.103 v1(74.435,18.103) ; U1.52 U1.52 74.378,31.378 74.437,31.437 v1(74.437,31.491)
  Bottom Layer w0.305: S1.2 2.234,9.083 3.953,10.803 23.883,10.803 v1(24.166,10.52) ; v1(74.435,18.103) 74.435,31.493 v1(74.437,31.491)
S1: R3.2 U1.37 | length 73.1
  Top Layer w0.305: R3.2 16.528,63.499 16.761,63.733 16.761,63.921 16.995,64.154 18.754,64.154 39.322,43.586 70.588,43.586 70.767,43.408 70.767,41.73 73.453,39.044 73.453,38.253 72.782,37.583 71.02,37.583 U1.37
S2: R8.2 U1.35 | length 63.5
  Top Layer w0.305: R8.2 39.562,7.143 45.899,13.48 v1(72.72,13.48) ; U1.35 v1(72.3,38.565)
  Bottom Layer w0.305: v1(72.3,38.565) 72.3,13.954 72.72,13.534 v1(72.72,13.48)
S3: R14.2 U1.33 | length 31.3
  Top Layer w0.305: R14.2 58.717,60.185 v1(60.066,58.837) ; v1(68.91,42.4) 70.424,40.886 70.424,39.583 70.442,39.565 U1.33
  Bottom Layer w0.305: v1(60.066,58.837) 63.289,58.837 68.91,53.216 v1(68.91,42.4)
S6: R22.2 U1.25 | length 37.7
  Top Layer w0.305: v1(75.778,39.124) 76.377,39.723 U1.25 ; R22.2 82.225,14.267 v1(82.23,14.272)
  Bottom Layer w0.305: v1(75.778,39.124) 75.811,39.091 75.811,19.878 81.417,14.272 v1(82.23,14.272)
S7: R27.2 U1.23 | length 34.8
  Top Layer w0.305: v1(77.32,42.708) 77.32,42.654 77.36,42.614 77.36,41.458 U1.23 ; v1(100.612,63.49) 100.623,63.501 102.173,63.501 R27.2
  Bottom Layer w0.305: v1(77.32,42.708) 77.421,42.708 98.203,63.49 v1(100.612,63.49)
S11: R35.2 U1.13 | length 70.1
  Top Layer w0.305: U1.13 83.702,38.065 84.639,39.002 115.885,39.002 125.024,29.863 v1(125.024,29.522) ; R35.2 v1(126.048,8.364)
  Bottom Layer w0.305: v1(125.024,29.522) 125.024,9.388 v1(126.048,8.364)
S12: R42.2 U1.11 | length 75.8
  Top Layer w0.305: U1.11 84.386,37.065 v1(84.54,36.91) ; v1(144.206,63.541) 144.22,63.526 145.632,63.526 R42.2
  Bottom Layer w0.305: v1(84.54,36.91) 89.369,36.91 98.151,45.692 128.394,45.692 144.267,61.565 144.267,63.51 144.297,63.541 v1(144.206,63.541)
SCK: R33.1 U1.62 XFMR1.9 | length 73.7
  Top Layer w0.305: U1.62 79.377,31.407 v1(79.629,31.659) ; R33.1 141.29,39.536 XFMR1.9 143.314,39.721 v1(143.4,39.807)
  Bottom Layer w0.305: v1(79.629,31.659) 81.105,33.134 136.727,33.134 v1(143.4,39.807)
SDI: U1.53
SDO: U1.54
VCC: BT7.1 P9.8 P10.7 P10.8 P10.9 P11.7 P11.8 P11.9 Q8.2 R11.2 R20.1 R43.1 S2.2 | length 234.7
  Top Layer w0.305: P9.8 -1.11,55.725 -2.113,54.722 -2.113,27.936 -2.21,27.839 -2.21,27.587 -2.113,27.49 -2.113,20.769 v1(-1.024,19.68) ; R11.2@69.236,28.914 v1(69.236,29.764) ; R11.2@69.336,28.748 R11.2 ; R20.1 86.922,35.073 88.545,35.073 v1(88.552,35.08) ; v1(146.525,62.989) 146.525,63.044 146.791,63.31 146.791,63.988 146.97,64.167 147.368,64.167 147.546,64.345 R43.1 Q8.2
  Int2 (PWR) w0.305: v1(-1.024,19.68) 0.796,19.68 0.851,19.625 68.879,19.625 69.057,19.804 69.057,29.585 v1(69.236,29.764) 69.29,29.764 69.445,29.919 83.391,29.919 v1(88.552,35.08) ; v1(128.092,44.393) 128.092,44.557 v1(146.525,62.989) 148.991,60.523 148.991,50.389 ; 158.978,50.537 P11.7
  Bottom Layer w0.254: S2.2 -1.082,19.621 v1(-1.024,19.68)
  Bottom Layer w0.305: v1(88.552,35.08) 97.865,44.393 v1(128.092,44.393)
VREF1: C2.2 U1.51 | length 4.4
  Top Layer w0.305: U1.51 73.877,29.002 75.121,27.759 75.121,27.37 75.777,26.713 C2.2
VREF2: C3.2 R36.1 R38.1 R41.1 R44.1 U1.50 | length 91
  Top Layer w0.305: R36.1 v1(7.086,18.14) ; R38.1 v1(7.076,23.22) ; R41.1 6.311,28.289 7.065,28.289 v1(7.076,28.277) ; R44.1 6.323,33.357 7.054,33.357 v1(7.076,33.334) ; v1(73.162,31.491) 73.162,31.437 73.396,31.203 73.396,30.209 U1.50 73.377,27.352 74.016,26.713 C3.2
  Int2 (PWR) w0.305: v1(7.076,28.277) 65.665,28.277 68.879,31.491 v1(73.162,31.491)
  Bottom Layer w0.305: v1(7.076,33.334) v1(7.076,28.277) v1(7.076,23.22) 7.076,18.149 v1(7.086,18.14)
VREG: C5.2 Q3.1 S1.3 U1.48 U1.55 | length 91.4
  Top Layer w0.305: v1(24.166,11.623) 25.573,11.623 33.558,19.609 59.18,19.609 66.372,26.8 C5.2 66.503,26.769 Q3.1 68.318,29.941 70.442,32.065 U1.48 74.799,32.065 75.86,31.004 75.86,30.208 U1.55
  Bottom Layer w0.305: S1.3 v1(24.166,11.623)
WDT: P9.9 U1.56 | length 87.5
  Top Layer w0.305: U1.56 v1(76.377,31.659)
  Int2 (PWR) w0.305: P9.9 33.1,58.416 53.114,38.402 69.634,38.402 v1(76.377,31.659)
pads on no net: BT1.3 BT1.4 BT1.5 BT2.3 BT2.4 BT2.5 BT3.3 BT3.4 BT3.5 BT4.3 BT4.4 BT4.5 BT5.3 BT5.4 BT5.5 BT6.3 BT6.4 BT6.5 BT7.3 BT7.4 BT7.5 P9.10 P9.11 P10.10 P10.11 P11.10 P11.11 S2.1 S2.P$1 S2.P$2 U1.2 U1.3 U1.5 U1.7 U1.9 U1.14 U1.15 U1.17 U1.19 U1.21 U1.26 U1.27 U1.29 U1.31 XFMR1.3 XFMR1.8
copper on no net: | length 525.1
  Top Layer w0.254: -1.742,-5.578 -0.072,-5.578 -0.069,-5.578 0,-5.578 ; 164.922,78.689 cw(c165.447,73.166) 170.97,73.69 ; 170.97,1.447 170.982,1.434
  Top Layer w0.5: -6.586,78.689 ccw(c-6.947,74.44) -11.196,74.8 -11.196,-0.04 ccw(c-5.881,-0.008) -5.85,-5.324 158.92,-5.324 164.77,-5.324 164.953,-5.324 ; -6.336,78.689 164.922,78.689 ; 164.77,-5.41 ccw(c164.37,1.202) 170.982,1.601 ; 170.97,1.447 170.97,1.601 170.97,73.69

## Polygon pours and split planes (outlines as drawn)
Cell5 on Int2 (PWR) "Cell1" (solid, pour order 25): 100.053,3.648 100.053,-2.719 126.881,-2.719 126.881,3.648
Cell3 on Int2 (PWR) "Cell1" (solid, pour order 24): 56.287,3.834 56.287,-2.534 83.114,-2.534 83.114,3.834
Cell4 on Int2 (PWR) "Cell4" (solid, pour order 19): 78.358,75.9 78.358,67.382 105.955,67.382 105.955,75.9
Cell2 on Int2 (PWR) "Cell2" (solid, pour order 18): 34.93,75.758 34.93,67.213 62.527,67.213 62.527,75.758
Cell6 on Int2 (PWR) "Cell6" (solid, pour order 13): 121.795,75.954 121.795,67.316 149.392,67.316 149.392,75.954
VCC on Int2 (PWR) "VCC" (solid, pour order 11): 163.445,47.842 163.445,49.95 163.487,49.992 163.1,50.296 161.354,51.532 143.891,51.532 143.891,-2.372 164.122,-2.372 163.755,18.089 158.958,21.331 158.958,46.154 161.757,46.154
Cell1 on Int2 (PWR) "Cell1" (solid, pour order 1): 13.139,3.462 13.139,-2.906 39.967,-2.906 39.967,3.462
Cell5 on Bottom Layer "Cell1" (solid, pour order 23): 100.172,3.545 100.172,-2.7 126.999,-2.7 126.999,3.545
Cell3 on Bottom Layer "Cell1" (solid, pour order 22): 56.502,3.479 56.502,-2.766 83.329,-2.766 83.329,3.479
Cell6 on Bottom Layer "Cell6" (solid, pour order 20): 121.795,76.032 121.795,67.316 149.392,67.316 149.392,76.032
Cell4 on Bottom Layer "Cell4" (solid, pour order 12): 78.358,75.844 78.358,67.382 105.955,67.382 105.955,75.844
Cell2 on Bottom Layer "Cell2" (solid, pour order 4): 34.93,75.72 34.93,67.213 62.527,67.213 62.527,75.72
Cell1 on Bottom Layer "Cell1" (solid, pour order 14): 13.09,3.416 13.09,-2.83 39.917,-2.83 39.917,3.416
GND on Top Layer "GND" (solid, pour order 3): -7.734,75.656 -7.734,-1.958 -7.661,-2.032 166.573,-2.032 166.573,76.017 166.647,76.091
GND on Int1 (GND) "GND" (solid, pour order 21): -7.734,75.656 -7.734,-1.958 -7.661,-2.032 166.573,-2.032 166.573,76.017 166.647,76.091

## Silkscreen, mask and mechanical layers (free items; w line width, h text height)
Top Overlay:
  drawing of 58 lines, arcs and shapes, not listed
  text "Cell 7" at 42.548,40.726 h0.64
  text "Cell 6" at 42.548,38.883 h0.64
  text "Cell 5" at 42.548,37.041 h0.64
  text "Cell 4" at 42.548,35.198 h0.64
  text "Cell 3" at 42.548,33.355 h0.64
  text "Cell 2" at 42.548,31.513 h0.64
  text "Cell 1" at 42.548,29.67 h0.64
  text "4501-WB-AV-BMS / REV. C / JAN 2021 / Pablo F. & Zeph K." at 116.836,16.308 h0.64
Bottom Overlay:
  text "-" at 5.79,77.425 h2 r180
  text "-" at 93.072,77.425 h2 r180
  text "-" at 49.452,77.382 h2 r180
  text "+" at 114.67,77.254 h2 r180
  text "+" at 71.175,77.203 h2 r180
  text "-" at 136.914,77.146 h2 r180
  text "+" at 27.261,77.132 h2 r180
  text "B6" at 43.421,63.568 h0.64 r270
  text "B7" at 45.345,63.568 h0.64 r270
  text "GND" at -0.298,35.01 h0.64 r270
  text "1" at -0.298,33.319 h0.64 r270
  text "GND" at -0.298,30.209 h0.64 r270
  text "2" at -0.298,28.074 h0.64 r270
  text "On" at -2.294,26.294 h0.64
  text "GND" at -0.298,25.063 h0.64 r270
  text "3" at -0.298,22.378 h0.64 r270
  text "GND" at -0.298,19.94 h0.64 r270
  text "4" at -0.298,17.453 h0.64 r270
  text "5" at -0.298,14.852 h0.64 r270
  text "6" at -0.298,12.292 h0.64 r270
  text "7" at -0.298,9.803 h0.64 r270
  text "8" at -0.298,7.151 h0.64 r270
  text "9" at -0.298,4.662 h0.64 r270
  text "+" at 5.956,-2.614 h2 r180
  text "+" at 49.443,-2.614 h2 r180
  text "+" at 92.753,-2.614 h2 r180
  text "+" at 136.489,-2.614 h2 r180
  text "-" at 27.788,-2.97 h2 r180
  text "-" at 71.339,-2.97 h2 r180
  text "-" at 114.562,-2.97 h2 r180

## Text inside footprints (layer, text, board x,y; h text height)
BT1: Mechanical 7 "Default Padstyle: EX82Y82D62P" at 1.326,26.881 h1.27 r270; Mechanical 7 "1st Mtg Padstyle: RX110Y80D50P" at -0.579,26.563 h1.27 r270; Mechanical 7 "2nd Mtg Padstyle: EX70Y70D70P" at -2.484,26.881 h1.27 r270; Mechanical 7 "3rd Mtg Padstyle: EX70Y70D70P" at -4.389,26.881 h1.27 r270; Mechanical 7 "Left Mtg Padstyle: EX150Y150D150P" at -6.294,25.611 h1.27 r270; Mechanical 7 "Right Mtg Padstyle: EX104Y104D104P" at -8.199,25.293 h1.27 r270; Mechanical 7 "Alt Padstyle 1: OX60Y90D30P" at -10.104,27.516 h1.27 r270; Mechanical 7 "Alt Padstyle 2: OX90Y60D30P" at -12.009,27.516 h1.27 r270; Mechanical 7 "2.845in/72.263mm" at 28.961,-20.649 h0.64 r270; Mechanical 7 "3.044in/77.318mm" at 37.216,33.548 h0.64 r270; Mechanical 7 "0in/0mm" at 15.651,77.795 h0.64 r270; Mechanical 7 "0.406in/10.325mm" at 20.814,-18.572 h0.64 r270; Mechanical 7 "0.823in/20.904mm" at 15.524,-17.302 h0.64 r270; Mechanical 7 "1.092in/27.75mm" at 31.882,47.582 h0.64 r270; Mechanical 7 "1.422in/36.132mm" at 31.882,51.614 h0.64 r270
BT2: Mechanical 7 "Default Padstyle: EX82Y82D62P" at 52.12,45.309 h1.27 r90; Mechanical 7 "1st Mtg Padstyle: RX110Y80D50P" at 54.025,45.626 h1.27 r90; Mechanical 7 "2nd Mtg Padstyle: EX70Y70D70P" at 55.93,45.309 h1.27 r90; Mechanical 7 "3rd Mtg Padstyle: EX70Y70D70P" at 57.835,45.309 h1.27 r90; Mechanical 7 "Left Mtg Padstyle: EX150Y150D150P" at 59.74,46.579 h1.27 r90; Mechanical 7 "Right Mtg Padstyle: EX104Y104D104P" at 61.645,46.896 h1.27 r90; Mechanical 7 "Alt Padstyle 1: OX60Y90D30P" at 63.55,44.674 h1.27 r90; Mechanical 7 "Alt Padstyle 2: OX90Y60D30P" at 65.455,44.674 h1.27 r90; Mechanical 7 "2.845in/72.263mm" at 24.485,92.838 h0.64 r90; Mechanical 7 "3.044in/77.318mm" at 16.23,38.641 h0.64 r90; Mechanical 7 "0in/0mm" at 37.794,-5.606 h0.64 r90; Mechanical 7 "0.406in/10.325mm" at 32.632,90.762 h0.64 r90; Mechanical 7 "0.823in/20.904mm" at 37.921,89.492 h0.64 r90; Mechanical 7 "1.092in/27.75mm" at 21.564,24.608 h0.64 r90; Mechanical 7 "1.422in/36.132mm" at 21.564,20.575 h0.64 r90
BT3: Mechanical 7 "Default Padstyle: EX82Y82D62P" at 44.85,26.881 h1.27 r270; Mechanical 7 "1st Mtg Padstyle: RX110Y80D50P" at 42.945,26.563 h1.27 r270; Mechanical 7 "2nd Mtg Padstyle: EX70Y70D70P" at 41.04,26.881 h1.27 r270; Mechanical 7 "3rd Mtg Padstyle: EX70Y70D70P" at 39.135,26.881 h1.27 r270; Mechanical 7 "Left Mtg Padstyle: EX150Y150D150P" at 37.23,25.611 h1.27 r270; Mechanical 7 "Right Mtg Padstyle: EX104Y104D104P" at 35.325,25.293 h1.27 r270; Mechanical 7 "Alt Padstyle 1: OX60Y90D30P" at 33.42,27.516 h1.27 r270; Mechanical 7 "Alt Padstyle 2: OX90Y60D30P" at 31.515,27.516 h1.27 r270; Mechanical 7 "2.845in/72.263mm" at 72.485,-20.649 h0.64 r270; Mechanical 7 "3.044in/77.318mm" at 80.74,33.548 h0.64 r270; Mechanical 7 "0in/0mm" at 59.175,77.795 h0.64 r270; Mechanical 7 "0.406in/10.325mm" at 64.338,-18.572 h0.64 r270; Mechanical 7 "0.823in/20.904mm" at 59.048,-17.302 h0.64 r270; Mechanical 7 "1.092in/27.75mm" at 75.406,47.582 h0.64 r270; Mechanical 7 "1.422in/36.132mm" at 75.406,51.614 h0.64 r270
BT4: Mechanical 7 "1.422in/36.132mm" at 65.112,20.575 h0.64 r90; Mechanical 7 "1.092in/27.75mm" at 65.112,24.608 h0.64 r90; Mechanical 7 "0.823in/20.904mm" at 81.469,89.492 h0.64 r90; Mechanical 7 "0.406in/10.325mm" at 76.18,90.762 h0.64 r90; Mechanical 7 "0in/0mm" at 81.342,-5.606 h0.64 r90; Mechanical 7 "3.044in/77.318mm" at 59.778,38.641 h0.64 r90; Mechanical 7 "2.845in/72.263mm" at 68.033,92.838 h0.64 r90; Mechanical 7 "Alt Padstyle 2: OX90Y60D30P" at 109.003,44.674 h1.27 r90; Mechanical 7 "Alt Padstyle 1: OX60Y90D30P" at 107.098,44.674 h1.27 r90; Mechanical 7 "Right Mtg Padstyle: EX104Y104D104P" at 105.193,46.896 h1.27 r90; Mechanical 7 "Left Mtg Padstyle: EX150Y150D150P" at 103.288,46.579 h1.27 r90; Mechanical 7 "3rd Mtg Padstyle: EX70Y70D70P" at 101.383,45.309 h1.27 r90; Mechanical 7 "2nd Mtg Padstyle: EX70Y70D70P" at 99.478,45.309 h1.27 r90; Mechanical 7 "1st Mtg Padstyle: RX110Y80D50P" at 97.573,45.626 h1.27 r90; Mechanical 7 "Default Padstyle: EX82Y82D62P" at 95.668,45.309 h1.27 r90
BT5: Mechanical 7 "1.422in/36.132mm" at 118.978,51.637 h0.64 r270; Mechanical 7 "1.092in/27.75mm" at 118.978,47.605 h0.64 r270; Mechanical 7 "0.823in/20.904mm" at 102.62,-17.28 h0.64 r270; Mechanical 7 "0.406in/10.325mm" at 107.91,-18.55 h0.64 r270; Mechanical 7 "0in/0mm" at 102.747,77.818 h0.64 r270; Mechanical 7 "3.044in/77.318mm" at 124.312,33.571 h0.64 r270; Mechanical 7 "2.845in/72.263mm" at 116.057,-20.626 h0.64 r270; Mechanical 7 "Alt Padstyle 2: OX90Y60D30P" at 75.087,27.539 h1.27 r270; Mechanical 7 "Alt Padstyle 1: OX60Y90D30P" at 76.992,27.539 h1.27 r270; Mechanical 7 "Right Mtg Padstyle: EX104Y104D104P" at 78.897,25.316 h1.27 r270; Mechanical 7 "Left Mtg Padstyle: EX150Y150D150P" at 80.802,25.634 h1.27 r270; Mechanical 7 "3rd Mtg Padstyle: EX70Y70D70P" at 82.707,26.904 h1.27 r270; Mechanical 7 "2nd Mtg Padstyle: EX70Y70D70P" at 84.612,26.904 h1.27 r270; Mechanical 7 "1st Mtg Padstyle: RX110Y80D50P" at 86.517,26.586 h1.27 r270; Mechanical 7 "Default Padstyle: EX82Y82D62P" at 88.422,26.904 h1.27 r270
BT6: Mechanical 7 "1.422in/36.132mm" at 108.684,20.575 h0.64 r90; Mechanical 7 "1.092in/27.75mm" at 108.684,24.608 h0.64 r90; Mechanical 7 "0.823in/20.904mm" at 125.041,89.492 h0.64 r90; Mechanical 7 "0.406in/10.325mm" at 119.752,90.762 h0.64 r90; Mechanical 7 "0in/0mm" at 124.914,-5.606 h0.64 r90; Mechanical 7 "3.044in/77.318mm" at 103.35,38.641 h0.64 r90; Mechanical 7 "2.845in/72.263mm" at 111.605,92.838 h0.64 r90; Mechanical 7 "Alt Padstyle 2: OX90Y60D30P" at 152.575,44.674 h1.27 r90; Mechanical 7 "Alt Padstyle 1: OX60Y90D30P" at 150.67,44.674 h1.27 r90; Mechanical 7 "Right Mtg Padstyle: EX104Y104D104P" at 148.765,46.896 h1.27 r90; Mechanical 7 "Left Mtg Padstyle: EX150Y150D150P" at 146.86,46.579 h1.27 r90; Mechanical 7 "3rd Mtg Padstyle: EX70Y70D70P" at 144.955,45.309 h1.27 r90; Mechanical 7 "2nd Mtg Padstyle: EX70Y70D70P" at 143.05,45.309 h1.27 r90; Mechanical 7 "1st Mtg Padstyle: RX110Y80D50P" at 141.145,45.626 h1.27 r90; Mechanical 7 "Default Padstyle: EX82Y82D62P" at 139.24,45.309 h1.27 r90
BT7: Mechanical 7 "Default Padstyle: EX82Y82D62P" at 131.994,26.982 h1.27 r270; Mechanical 7 "1st Mtg Padstyle: RX110Y80D50P" at 130.089,26.665 h1.27 r270; Mechanical 7 "2nd Mtg Padstyle: EX70Y70D70P" at 128.184,26.982 h1.27 r270; Mechanical 7 "3rd Mtg Padstyle: EX70Y70D70P" at 126.279,26.982 h1.27 r270; Mechanical 7 "Left Mtg Padstyle: EX150Y150D150P" at 124.374,25.712 h1.27 r270; Mechanical 7 "Right Mtg Padstyle: EX104Y104D104P" at 122.469,25.395 h1.27 r270; Mechanical 7 "Alt Padstyle 1: OX60Y90D30P" at 120.564,27.617 h1.27 r270; Mechanical 7 "Alt Padstyle 2: OX90Y60D30P" at 118.659,27.617 h1.27 r270; Mechanical 7 "2.845in/72.263mm" at 159.629,-20.547 h0.64 r270; Mechanical 7 "3.044in/77.318mm" at 167.884,33.65 h0.64 r270; Mechanical 7 "0in/0mm" at 146.319,77.897 h0.64 r270; Mechanical 7 "0.406in/10.325mm" at 151.482,-18.471 h0.64 r270; Mechanical 7 "0.823in/20.904mm" at 146.192,-17.201 h0.64 r270; Mechanical 7 "1.092in/27.75mm" at 162.55,47.683 h0.64 r270; Mechanical 7 "1.422in/36.132mm" at 162.55,51.716 h0.64 r270
U1: Top Overlay "*" at 84.086,32.735 h1.27 r180; Mechanical 13 "*" at 81.564,32.45 h1.27 r180